# Altium PCB HMC5883_module.PcbDoc
Units mm, origin at the board's own origin, x right, y up, seen from the top; angles counter-clockwise.
Board outline 57.79 x 25.4 mm, 2 copper layers (Top Layer, Bottom Layer), stack 1.569 mm thick; 52 components, 35 nets, 175 pads, 129 vias.
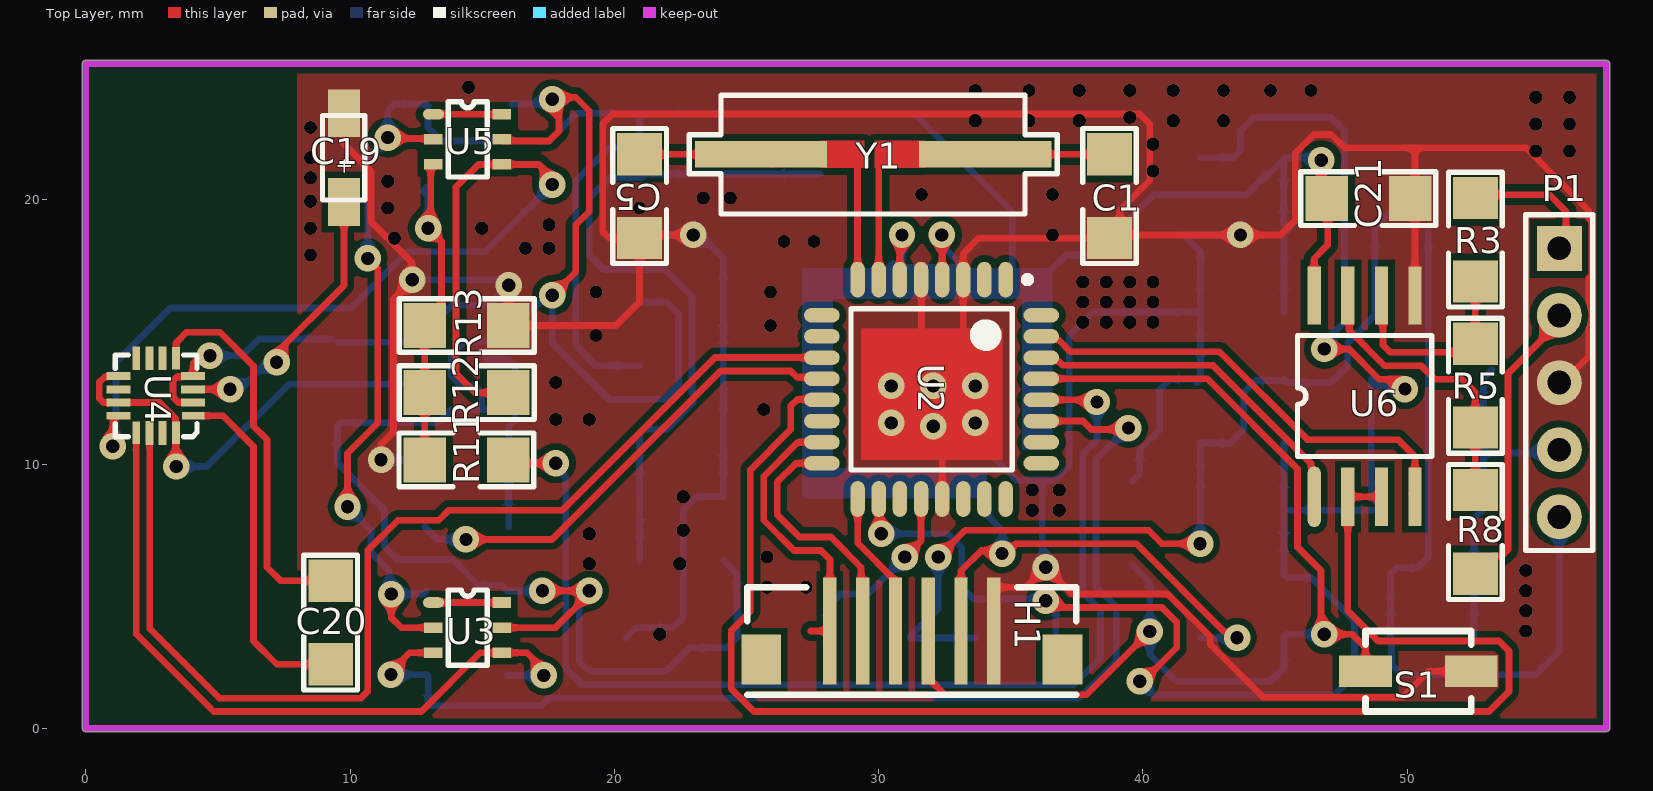
[diagram p0: Top Layer view]
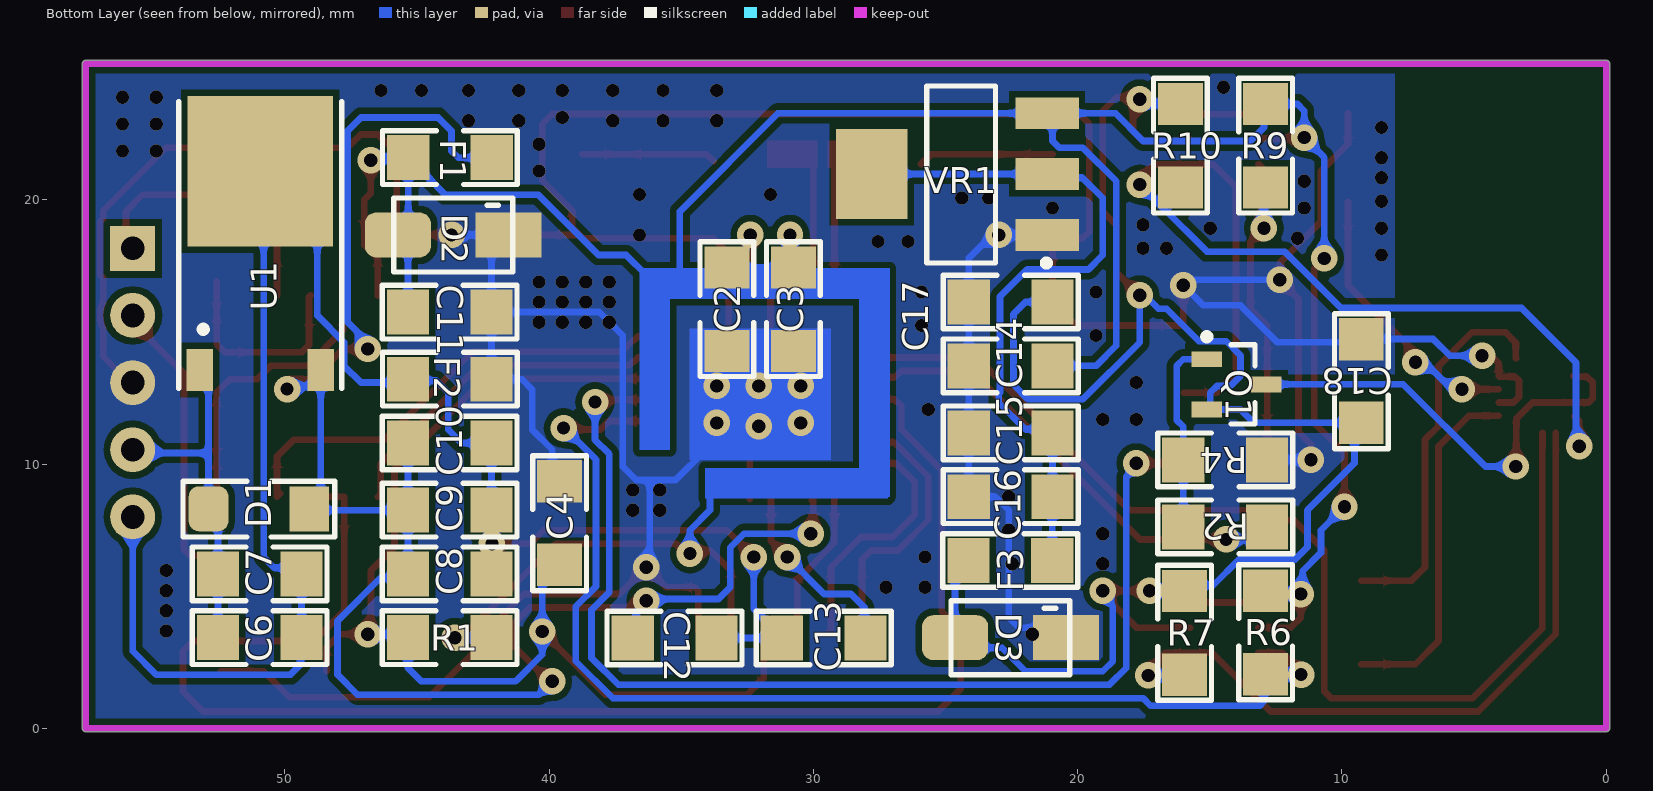
[diagram p1: Bottom Layer view, seen from below]

## Layer stack, top to bottom
Top Solder: solder mask 0.0254, SM-001, Dk 4
Top Layer: signal copper 0.035
Dielectric 1: core 1.4986, Core-043, Dk 4.3
Bottom Layer: signal copper 0.035
Bottom Solder: solder mask 0.0254, SM-001, Dk 4

## Board outline
-0.127,0 ccw(c0,0) 0,-0.127 57.531,-0.127 ccw(c57.531,0) 57.658,0 57.658,25.146 ccw(c57.531,25.146) 57.531,25.273 0,25.273 ccw(c0,25.146) -0.127,25.146

## Design rules (kind name [scope] priority, off if disabled: settings)
Clearance [All] p1: gap=0.254 ignorepadtopadclearanceinfootprint=FALSE
PolygonConnect [All] p1: connectstyle=Direct reliefconductorwidth=0.254 reliefentries=4 polygonreliefangle="90 Angle" airgapwidth=0.254
RoutingVias [All] p1: holewidth=0.5 width=1 viastyle="Through Hole" minholewidth=0.5 minwidth=1 maxholewidth=0.5 maxwidth=1
SolderMaskExpansion [All] p1: expansion=0.102 istentingtop=FALSE
Width [All] p1: maxlimit=0.254 minlimit=0.254 preferedwidth=0.254
30 further rules are at their usual default settings.

## Components (designator, comment, footprint, x,y, rotation, side; value= is the part's Value field where it differs from the comment)
C1 "18pF" 1206 38.76,20.154 r0 top
C2 "100nF" 1206 33.249,15.875 r180 bottom
C3 "100nF" 1206 30.734,15.875 r180 bottom
C4 "100nF" 1206 39.624,7.747 r0 bottom
C5 "18pF" 1206 20.98,20.154 r0 top
C6 "100nf" 1206 50.964,3.454 r90 bottom
C7 "100uf" 1206 50.964,5.867 r90 bottom
C8 "100uf" 1206 43.776,5.867 r90 bottom
C9 "100nf" 1206 43.776,8.28 r90 bottom
C10 "100nf" 1206 43.776,10.82 r90 bottom
C11 "100nf" 1206 43.776,15.773 r90 bottom
C12 "100nF" 1206 35.267,3.443 r90 bottom
C13 "100nF" 1206 29.591,3.392 r270 bottom
C14 "Cap" 1206 22.518,13.691 r270 bottom value=100nF
C15 "Cap" 1206 22.518,11.151 r270 bottom value=100uF
C16 "Cap" 1206 22.518,8.738 r270 bottom value=100nF
C17 "Cap" 1206 22.518,16.104 r270 bottom value=100nF
C18 "Cap" 1206 9.296,13.12 r0 bottom value=100nF
C19 "Cap2" CAP_SMD_A 9.75,21.59 r90 top value=4.7uf
C20 "Cap" 1206 9.246,3.988 r180 top value=220nf
C21 "Cap" 1206 48.514,20.066 r90 top value=100nF
D1 "D Schottky" ZINER 50.927,8.255 r90 bottom
D2 "SMBJ 5V" TVS 43.561,18.644 r270 bottom
D3 "SMBJ 3V3" TVS 22.479,3.404 r270 bottom
F1 "Ferrite-3uH" 1206 43.764,21.615 r90 bottom
F2 "Ferrite-3uH" 1206 43.739,13.183 r270 bottom
F3 "FERRITE BEAD" 1206 22.567,6.375 r90 bottom
H1 "White SMD Connector 6pin" "White SMD Connector 6pin B" 31.257,3.683 r180 top
P1 "Header 5" HDR1X5 55.753,18.161 r270 top
Q1 "BC807" SOT-23 14.032,13.046 r270 bottom
R1 "6.8k" 1206 43.776,3.454 r90 bottom
R2 "2.2K" 1206 14.402,7.595 r270 bottom
R3 "22" 1206 52.603,18.503 r0 top
R4 "10k" 1206 14.402,10.135 r270 bottom
R5 "220" 1206 52.553,12.947 r180 top
R6 "2.2K" 1206 12.864,3.644 r180 bottom
R7 "2.2K" 1206 15.927,3.632 r180 bottom
R8 "22" 1206 52.553,7.417 r180 top
R9 "2.2K" 1206 12.864,22.059 r180 bottom
R10 "2.2K" 1206 16.091,22.059 r180 bottom
R11 "1K" 1206 14.39,10.185 r90 top
R12 "0" 1206 14.427,12.675 r270 top
R13 "1.2K" 1206 14.427,15.215 r270 top
S1 "SW-PB_SMD" PB4x3.2 50.419,2.159 r180 top
U1 "L7805" DPAK 50.673,16.874 r90 bottom
U2 "ATmega328P-AU" 32A_L 32.004,12.827 r270 top
U3 "NDC7002N" SOP6 13.158,4.76 r0 top
U4 "HMC5883" LCC16 1.212,11.827 r180 top
U5 "NDC7002N" SOP6 13.158,23.236 r0 top
U6 "RS485 module" SOP8 48.26,12.573 r90 top
VR1 "AMS1117 3v3" LD1117 24.384,20.955 r90 bottom
Y1 "14.7456KHz" XTAL_SMD 29.54,21.666 r180 top

## Footprints (in the part's own frame and the unit in brackets; to place one, negate y for a bottom-side part, rotate by r counter-clockwise, add the part's x,y. Pads: shape width x height; smd on the part's side, far side on the other; paste and mask are expansions set on the pad)
32A_L [mm] "Thin QFP, 32-Leads, Body 7x7mm, Pitch 0.8mm, IPC High Density"
  oval 1.35x0.55 smd: 1(-4.15,2.8) 2(-4.15,2) 3(-4.15,1.2) 4(-4.15,0.4) 5(-4.15,-0.4) 6(-4.15,-1.2) 7(-4.15,-2) 8(-4.15,-2.8) 17(4.15,-2.8) 18(4.15,-2) 19(4.15,-1.2) 20(4.15,-0.4) 21(4.15,0.4) 22(4.15,1.2) 23(4.15,2) 24(4.15,2.8)
  oval 0.55x1.35 smd: 9(-2.8,-4.15) 10(-2,-4.15) 11(-1.2,-4.15) 12(-0.4,-4.15) 13(0.4,-4.15) 14(1.2,-4.15) 15(2,-4.15) 16(2.8,-4.15) 25(2.8,4.15) 26(2,4.15) 27(1.2,4.15) 28(0.4,4.15) 29(-0.4,4.15) 30(-1.2,4.15) 31(-2,4.15) 32(-2.8,4.15)
  silkscreen extent -4.27,-3.05 3.05,3.75, body extent -3.5,-3.5 3.5,3.5, height 1.2
1206 [mm]
  rect 1.7x1.6 smd: 1(-0.025,-1.6) 2(-0.025,1.563)
  silkscreen extent -1.04,-2.57 0.99,2.54, body extent -0.81,-1.68 0.79,1.68, height 1.1
CAP_SMD_A [mm]
  rect 1.8x1.2 smd: 1(-1.676,-0.025) 2(1.676,-0.025)
  silkscreen extent -1.6,-0.81 1.6,0.79
DPAK [mm]
  rect 1.6x1 smd: 1(-3.319,2.539) 3(-3.319,-2.031)
  rect 5.7x5.5 smd: 2(4.208,0.254)
  silkscreen extent -4.02,-2.83 6.83,3.34
HDR1X5 [mm] "Connector; Header; 5 Position"
  rect 1.7x1.7 hole 0.9: 1(0,0)
  round 1.7 hole 0.9: 2(2.54,0) 3(5.08,0) 4(7.62,0) 5(10.16,0)
  silkscreen extent -1.27,-1.27 11.43,1.27
LCC16 [mm] "HMC5883"
  rect 0.9x0.3 smd: 1(-0.025,0) 2(-0.025,-0.5) 3(-0.025,-1) 4(-0.025,-1.5) 9(-2.852,-1.5) 10(-2.852,-1) 11(-2.852,-0.5)
  rect 0.3x0.9 smd: 5(-0.701,-2.176) 6(-1.201,-2.176) 7(-1.701,-2.176) 14(-1.701,0.65) 15(-1.201,0.65)
  rect 0.3x0.85 smd: 8(-2.201,-2.176) 13(-2.201,0.65) 16(-0.701,0.65)
  rect 0.85x0.3 smd: 12(-2.852,0)
  silkscreen extent -3,-2.3 0.1,0.8, body extent -2.95,-2.26 0.05,0.74, height 0.9
LD1117 [mm]
  rect 1.2x2.4 smd: 1(-2.286,-3.226) 2(0.017,-3.226) 3(2.316,-3.226)
  rect 3.4x2.7 smd: 2(0.017,3.404)
  silkscreen extent -3.48,-3.32 3.35,1.33, body extent -3.35,-1.82 3.35,1.88, height 1.7
PB4x3.2 [mm]
  rect 2x1.2 smd: 1(-2,0) 2(2,0)
  silkscreen extent -2,-1.52 2,1.52
SOP6 [mm]
  oval 0.8x0.4 smd: 1(0,0)
  rect 0.7x0.4 smd: 2(0,-0.95) 3(0,-1.9) 4(2.59,-1.9) 5(2.59,-0.95) 6(2.59,0)
  silkscreen extent 0.56,-2.38 2.03,0.48, body extent -0.13,-2.41 2.67,0.49, height 0.97
SOP8 [mm]
  oval 2.3x0.5 smd: 1(-3.81,1.778)
  rect 2.2x0.5 smd: 2(-3.81,0.508) 3(-3.81,-0.762) 4(-3.81,-2.032) 5(3.806,-2.032) 6(3.806,-0.762) 7(3.806,0.508) 8(3.806,1.778)
  silkscreen extent -2.29,-2.67 2.29,2.41
SOT-23 [mm]
  rect 0.6x1.15 smd: 1(-0.919,-1.081) 2(0.981,-1.081) 3(0.031,1.169)
  silkscreen extent -1.89,-1.21 1.53,0.74, body extent -1.42,-1.18 1.48,1.12, height 1
TVS [mm]
  rrect50% 1.7x2.5 smd: 1(-0.025,-2.159)
  rect 1.7x2.5 smd: 2(-0.025,2.032)
  silkscreen extent -1.42,-2.32 1.38,2.18, body extent -1.5,-2.76 1.42,2.74, height 2.23
"White SMD Connector 6pin B" [mm] "White SMD Connector 6pin"
  rect 0.508x4.064 smd: 1(-3.1,0) 2(-1.86,0) 3(-0.62,0) 4(0.62,0) 5(1.86,0) 6(3.1,0)
  rect 1.5x1.9 smd: ""(-5.7,1.082) ""(5.7,1.082)
  silkscreen extent -6.22,-1.65 6.22,2.41
XTAL_SMD [mm]
  rect 5x1 smd: 1(-4.496,-0.051) 2(3.988,-0.051)
  silkscreen extent -7.21,-2.29 6.71,2.21
ZINER [mm]
  rect 1.7x1.5 smd mask+0.102: 1(0.051,-1.854)
  rrect50% 1.7x1.5 smd: 2(0.051,1.956)
  silkscreen extent -1.02,-2.82 1.09,2.92, body extent -0.75,-1.78 0.85,1.9, height 1.6

## Part data
C1 C2 C3 C4 C5 C12 C13: library part Cap, "Capacitor", LatestRevisionDate=17-Jul-2002, LatestRevisionNote="Re-released for DXP Platform.", PackageReference=RAD-0.3, Published=8-Jun-2000, Publisher="Altium Limited"
C6 C7 C8 C9 C10 C11: library part Cap, "Capacitor, 1206", LatestRevisionDate=17-Jul-2002, LatestRevisionNote="Re-released for DXP Platform.", PackageReference=RAD-0.3, Published=8-Jun-2000, Publisher="Altium Limited"
C14 C15 C16 C17 C18 C20 C21: "Capacitor", LatestRevisionDate=17-Jul-2002, LatestRevisionNote="Re-released for DXP Platform.", PackageReference=RAD-0.3, Published=8-Jun-2000, Publisher="Altium Limited"
C19: "TAN", PackageReference=CAPR5-4X5, Published=23-Sep-2002, Publisher="Altium Limited"
D1: "Schottky Diode, 1N4148", Code_JEDEC=DO-214-AA, LatestRevisionDate=17-Jul-2002, LatestRevisionNote="Re-released for DXP Platform.", PackageReference=SMB, Published=8-Jun-2000, Publisher="Altium Limited"
D2: library part "Diode 18TQ045", "Schottky Rectifier", ComponentLink1Description="Manufacturer Link", ComponentLink1URL=http://www.irf.com/, ComponentLink2Description=Datasheet, ComponentLink2URL=http://www.irf.com/product-info/datasheets/data/18tq.pdf, DatasheetVersion=Dec-1997, LatestRevisionDate=17-Jul-2002, LatestRevisionNote="Re-released for DXP Platform.", Note="Terminal 2 is the TAB and is electrically connected to the cathode", PackageReference=TO-220AC, PackageVersion=Feb-1998, Published=8-Jun-2000, Publisher="Altium Limited"
D3: library part "Diode 18TQ045", "TVS", ComponentLink1Description="Manufacturer Link", ComponentLink1URL=http://www.irf.com/, ComponentLink2Description=Datasheet, ComponentLink2URL=http://www.irf.com/product-info/datasheets/data/18tq.pdf, DatasheetVersion=Dec-1997, LatestRevisionDate=17-Jul-2002, LatestRevisionNote="Re-released for DXP Platform.", Note="Terminal 2 is the TAB and is electrically connected to the cathode", PackageReference=TO-220AC, PackageVersion=Feb-1998, Published=8-Jun-2000, Publisher="Altium Limited"
F1 F2: library part Inductor, "Inductor", Code_IEC=1005, Code_JEITA=0402, LatestRevisionDate=29-May-2009, LatestRevisionNote="IPC-7351 Footprint Added.", PackageDescription="Chip Inductor", PackageReference=0402-A, Published=8-Jun-2000, Publisher="Altium Limited"
F3: library part Inductor, Code_IEC=1005, Code_JEITA=0402, LatestRevisionDate=29-May-2009, LatestRevisionNote="IPC-7351 Footprint Added.", PackageDescription="Chip Inductor", PackageReference=0402-A, Published=8-Jun-2000, Publisher="Altium Limited"
H1: library part "Header 6", LatestRevisionDate=17-Jul-2002, LatestRevisionNote="Re-released for DXP Platform.", Publisher="Altium Limited"
P1: "Header, 5-Pin", LatestRevisionDate=17-Jul-2002, LatestRevisionNote="Re-released for DXP Platform.", Publisher="Altium Limited"
Q1: library part 2N3906, "PNP General Purpose Amplifier", ComponentLink1Description="Manufacturer Link", ComponentLink1URL=http://www.fairchildsemi.com/, ComponentLink2Description=Datasheet, ComponentLink2URL=http://www.fairchildsemi.com/ds/2N%2F2N3906.pdf, DatasheetVersion=1997, LatestRevisionDate=15-Jan-2003, LatestRevisionNote="PCB Footprint 'BCY-W3/D4.7' replaced", PackageDescription="TO, Flat Index; 3 In-Line, Axial Leads; Body Dia. 4.5mm; Leads 0.51 x 0.48 mm (max)", PackageReference=TO-92A, PackageVersion=Sep-1998, Published=8-Jun-2000, Publisher="Altium Limited"
R1: library part Res1, "Resistor, 6.8k", LatestRevisionDate=17-Jul-2002, LatestRevisionNote="Re-released for DXP Platform.", PackageReference=AXIAL-0.3, Published=8-Jun-2000, Publisher="Altium Limited"
R2 R3 R4 R5 R6 R7 R8 R9 R10 R11 R12 R13: library part Res1, "Resistor", LatestRevisionDate=17-Jul-2002, LatestRevisionNote="Re-released for DXP Platform.", PackageReference=AXIAL-0.3, Published=8-Jun-2000, Publisher="Altium Limited"
S1: library part SW-PB, "Switch", LatestRevisionDate=17-Jul-2002, LatestRevisionNote="Re-released for DXP Platform.", PackageReference=SPST-2, Published=24-Mar-1999, Publisher="Altium Limited"
U1: library part L7805CD2T, "Positive Voltage Regulator", ComponentLink1Description="Manufacturer Link", ComponentLink1URL=http://www.st.com/, DatasheetVersion=Dec-1998, LatestRevisionDate=17-Jul-2002, LatestRevisionNote="Re-released for DXP Platform.", PackageDescription="D2-PAK/TO-263-AB; 3 Leads (1 Cropped); Body 15.9 (inc. leads) x 10.4 mm (LxW max)", PackageReference=TO-263, Published=24-Aug-2001, Publisher="Altium Limited"
U2: "8-bit AVR Microcontroller, 32KB Flash, 1KB EEPROM, 2KB SRAM, 32-pin TQFP, Industrial Grade (-40°C to 85°C)", Supplier Part Number 1=ATMEGA328P-AU-ND, Code_JEDEC=MS-026-ABA, ComponentLink1Description="Manufacturer Link", ComponentLink1URL=http://www.atmel.com/products/avr/default.asp?, ComponentLink2Description="ATmega48A/48PA/88A/88PA/168A/168PA/328/328P Datasheet", ComponentLink2URL=http://www.atmel.com/dyn/resources/prod_documents/8271.pdf, ComponentLink3Description="ATmega48A/48PA/88A/88PA/168A/168PA/328/328P Summary", ComponentLink3URL=http://www.atmel.com/dyn/resources/prod_documents/8271S.pdf, ComponentLink4Description="Atmel.com Home", ComponentLink4URL=http://www.atmel.com, DatasheetVersion="revA, Jan-2010", PackageDescription="32-Lead, 7x7x1.0 mm Body, 0.8mm Lead Pitch, Thin Profile Plastic Quad Flat Package (TQFP)", PackageReference=32A, PackageVersion="revB, Oct-2001", Published=1-Apr-2010, Publisher="Altium Limited", Supplier 1=Digi-Key, Supplier 2=Farnell, Supplier 3=Mouser, Supplier Part Number 2=1715486, Supplier Part Number 3=556-ATMEGA328P-AU
U6: library part rs485
VR1: library part "Volt Reg", "Voltage Regulator", LatestRevisionDate=29-May-2009, LatestRevisionNote="IPC-7351 Footprint Added.", PackageDescription="3-Pin Transistor Outline Package 2.54 mm Pitch, 15.1 mm Lead Span", PackageReference=D2PAK, Published=24-Mar-1999, Publisher="Altium Limited"
Y1: library part XTAL, "Crystal Oscillator, 14.7456KHz", LatestRevisionDate=17-Jul-2002, LatestRevisionNote="Re-released for DXP Platform.", PackageReference=R38, Published=8-Jun-2000, Publisher="Altium Limited"

## Via types
v1: diameter 0.5, hole 0.5, Top Layer to Bottom Layer, 81 vias
v2: diameter 1, hole 0.5, Top Layer to Bottom Layer, 48 vias

## Nets (pads, with @x,y where several pads share a name; then routed paths per layer and width w, separated by ;. In a path a pad name is that pad's centre, name@x,y a point inside that pad or via, vN(x,y) a via of type N, cw(c..) or ccw(c..) an arc to the next point about the centre after c; other vN are vias at no path point)
3V3D: C17.2 C18.2 D3.1 F3.2 Q1.2 R7.2 R10.2 U3.5 U5.5 | length 70
  Top Layer w0.254: U3.5 17.78,3.81 19.05,5.08 18.923,5.207 v2(17.28,5.207) ; U5.5 15.809,22.225 17.526,22.225 17.907,22.606 v2@17.907,23.749 ; v2(17.653,16.383) 18.542,17.272 18.542,19.05 19.05,19.558 19.05,23.368 18.542,23.876 17.729,23.876 v2(17.653,23.8)
  Bottom Layer w0.254: R10.2 v2@17.653,23.622 ; v2(17.28,5.207) 17.268,5.195 R7.2 15.732,5.415 14.87,5.415 13.897,6.388 11.773,6.388 11.303,6.858 11.303,8.255 9.525,10.033 9.525,11.442 9.64,11.557 13.335,11.557 13.843,12.065 Q1.2 14.986,12.192 14.986,12.7 14.732,12.954 14.224,12.954 13.843,13.335 13.843,14.109 14.38,14.646 15.408,14.646 16.637,15.875 16.943,15.875 17.451,16.383 v2(17.653,16.383) 17.653,14.605 19.812,12.446 21.874,12.446 22.429,13.001 22.429,15.671 21.971,16.129 C17.2 ; v2(19.05,5.207) 19.05,5.005 18.669,4.624 18.669,2.54 19.05,2.159 21.971,2.159 22.86,3.048 24.257,3.048 D3.1 24.638,5.842 F3.2
5V0A: C8.2 C9.2 C10.2 C12.2 D1.1 F1.1 U1.3 U2.18 | length 67.8
  Top Layer w0.254: U2.18@30.061,8.62 U2.18 30.004,7.461 v2(30.099,7.366) ; v2(36.322,4.826) 36.576,4.572 40.727,4.572 41.275,4.024 41.275,3.048 40.005,1.778 v2(39.878,1.778) ; v2(46.863,14.351) 47.796,14.351 48.939,13.208 49.762,13.208 49.768,13.202 49.768,12.978 v2(49.911,12.835)
  Bottom Layer w0.254: v2(30.099,7.366) 32.615,7.366 33.147,6.834 33.147,5.334 33.591,4.889 36.258,4.889 36.703,4.445 36.703,3.545 C12.2 ; v2(39.878,1.778) 40.386,1.27 47.244,1.27 48.006,2.032 48.006,4.064 46.371,5.699 45.482,5.699 C8.2 C9.2 ; F1.1 43.434,21.59 43.688,21.844 43.688,22.606 44.196,23.114 47.117,23.114 47.625,22.606 47.625,15.367 46.863,14.605 v2(46.863,14.351) ; C10.2 C9.2 ; v2(49.911,12.835) 49.792,12.954 48.896,12.954 48.642,13.208 48.642,8.737 D1.1 49.022,8.255 C9.2
5V0D: C2.2 C3.2 C11.2 C14.2 C21.2 D2.1 F1.2 H1.2 R1.1 R6.2 R9.2 U2.4 U2.6 U3.2 U5.2 U6.8 VR1.3 | length 122
  Top Layer w0.254: v2(9.906,8.382) 9.906,10.406 11.049,11.549 11.049,17.399 v2(10.668,17.78) ; v2(11.43,22.352) 11.463,22.319 13.125,22.319 U5.2 ; v2(11.557,5.08) 11.557,4.191 11.938,3.81 U3.2 ; U2.6 30.804,18.588 v2(30.885,18.669) ; v2(32.385,18.669) 32.404,18.65 U2.4 ; H1.2 33.117,5.963 33.885,6.731 34.552,6.731 v2(34.671,6.612) 34.82,6.612 35.193,6.985 39.751,6.985 43.065,3.671 43.117,3.671 43.359,3.429 v2(43.561,3.429) ; U6.8 46.482,17.78 46.99,18.288 46.99,20.002 C21.2 46.744,20.248 v2(46.744,21.495)
  Bottom Layer w0.254: v2(9.906,8.382) 10.795,7.493 10.795,6.648 11.482,5.961 11.482,5.155 v2(11.557,5.08) 12.762,5.08 R6.2 ; v2(10.668,17.78) 10.668,21.59 v2(11.43,22.352) 11.43,23.368 11.684,23.622 R9.2 12.954,23.557 12.954,22.733 13.462,22.225 17.526,22.225 18.572,23.271 VR1.3 ; C14.2 19.304,13.716 18.542,14.478 18.542,20.701 19.812,21.971 20.701,21.971 20.955,22.225 20.955,23.068 VR1.3 ; 28.702,16.764 28.829,16.891 29.845,16.891 C3.2@30.551,17.597 ; C3.2 30.885,17.563 v2(30.885,18.669) ; C3.2@30.809,17.438 C2.2@33.224,17.438 ; v2(32.385,18.669) 32.385,18.467 32.551,18.301 32.551,18.111 C2.2@33.224,17.438 ; C2.2 C2.2@33.224,17.438 ; 33.528,9.144 33.655,9.144 33.909,8.89 33.909,8.255 34.671,7.493 v2(34.671,6.612) ; 35.052,17.145 35.052,19.558 31.339,23.271 VR1.3 ; 36.195,17.145 36.322,17.145 37.084,17.907 38.128,17.907 40.414,20.193 43.93,20.193 44.604,20.867 44.654,20.867 F1.2@45.327,21.54 ; R1.1 v2(43.561,3.429) ; C11.2 45.339,18.681 45.524,18.865 45.327,19.062 F1.2@45.327,21.54 ; v2(46.744,21.495) 46.649,21.59 F1.2 F1.2@45.327,21.54
DRDY: U2.11 U4.15 | length 42.4
  Top Layer w0.254: 2.414,10.605 U4.15 ; 2.422,10.605 2.422,3.775 5.054,1.143 10.414,1.143 10.668,1.397 10.668,6.731 11.811,7.874 13.359,7.874 13.74,8.255 18.034,8.255 23.806,14.027 U2.11
GND: C6.1 C7.1 C8.1 C9.1 C10.1 C12.1 C13.1 F2.1 P1.5 U1.2 | length 65.9
  Top Layer w0.254: v2(32.258,6.477) 33.274,7.493 40.215,7.493 40.723,6.985 v2(42.164,6.985)
  Bottom Layer w0.254: v2@32.258,6.223 32.258,4.535 31.191,3.468 C13.1 C12.1 ; v2@42.176,6.985 C9.1 C10.1 43.307,10.795 43.815,11.303 43.815,12.7 44.273,13.158 F2.1@45.339,13.158 ; F2.1 F2.1@45.339,13.158 ; U1.2@50.8,18.796 50.8,6.477 50.396,6.073 49.595,6.073 C7.1 C6.1 49.403,3.39 49.403,2.413 49.784,2.032 54.864,2.032 55.753,2.921 P1.5 ; U1.2 48.768,18.923 48.768,15.621 47.752,14.605 47.752,13.716 47.117,13.081 45.416,13.081 F2.1@45.339,13.158
GNDD: C1.1 C2.1 C3.1 C4.1 C5.1 C11.1 C14.1 C15.1 C16.1 C17.1 C18.1 C19.2 C21.1 D2.2 D3.2 F2.2 H1.1 P1.3 R4.2 R13.2 S1.1 U2.3 U2.5 U2.21 U4.9 U4.11 U6.5 VR1.1 | length 211.2
  Top Layer w0.254: U4.11 3.51,12.327 3.302,12.535 3.302,13.155 3.451,13.304 4.041,13.304 U4.9 ; U4.9@4.064,13.358 4.064,13.805 4.213,13.954 4.556,13.954 v2(4.699,14.097) ; C19.2 9.775,22.102 10.795,21.082 10.795,19.175 12.326,17.644 12.326,17.005 v2(12.355,16.976) ; v2(11.176,10.16) 11.176,10.743 11.646,11.213 11.646,16.248 12.146,16.748 12.232,16.748 v2@12.407,16.924 ; v2(16.002,16.764) 16.002,15.252 R13.2 20.066,15.24 20.955,16.129 C5.1 ; v2(22.987,18.669) 21.07,18.669 C5.1 ; U2.5 31.547,16.92 31.623,16.845 31.623,14.859 30.734,13.97 30.734,12.954 30.734,11.557 30.928,11.751 30.928,12.534 33.204,14.81 U2.3 33.204,17.964 33.782,18.542 36.576,18.542 C1.1@38.735,18.542 ; 32.385,10.668 32.404,10.649 U2.21 ; 33.196,10.525 33.196,11.225 v2@33.528,11.557 ; H1.1 34.357,5.207 34.484,5.334 35.56,5.334 v2(36.322,6.096) 37.338,5.08 40.938,5.08 42.545,3.473 42.545,3.175 44.542,1.178 49.819,1.178 50.8,2.159 S1.1 ; C1.1 C1.1@38.85,18.669 ; U6.5 50.292,19.813 50.114,19.991 C21.1 50.292,20.218 50.292,21.971 ; P1.3 55.88,13.081 56.867,14.068 56.867,15.096 ccw(c55.753,15.621) 56.867,16.146 56.867,17.036 56.984,17.153 56.984,19.169 56.867,19.286 56.867,19.587 56.792,19.662 54.483,21.971 50.292,21.971 ; C5.1 20.943,18.542 19.812,18.542 19.558,18.796 19.558,22.86 19.939,23.241 39.497,23.241 39.878,23.241 40.259,22.86 40.259,22.098 40.259,21.082 40.259,20.723 39.122,19.586 39.122,18.941 C1.1@38.85,18.669 ; C1.1@38.85,18.669 v2(43.688,18.669) 45.212,18.669 45.76,19.217 45.76,21.757 46.474,22.471 47.125,22.471 47.625,21.971 50.292,21.971
  Bottom Layer w0.254: v2(4.699,14.097) 5.914,14.097 6.549,14.732 9.259,14.732 C18.1 ; C18.1@9.525,14.605 12.446,14.605 13.843,16.002 15.24,16.002 v2(16.002,16.764) 15.8,16.764 15.589,16.976 v2(12.355,16.976) ; v2(11.176,10.16) R4.2 ; D3.2 20.828,3.81 22.225,3.81 22.606,4.191 v1(22.606,7.493) 22.606,8.255 23.114,8.763 C16.1 C15.1 C14.1 C17.1 24.118,17.792 23.241,18.669 v2(22.987,18.669) VR1.1 ; 33.274,10.668 33.401,10.541 34.068,10.541 35.211,9.398 36.195,9.398 ; v2(36.322,6.096) 36.195,6.223 36.195,9.398 ; C4.1 39.878,9.627 39.878,10.541 40.64,11.303 40.64,12.827 41.021,13.208 41.922,13.208 42.049,13.081 F2.2 C11.1 ; v2(43.688,18.669) D2.2 42.176,18.022 C11.1 ; 36.195,9.398 36.703,9.398 37.211,9.906 37.211,14.859 v1(37.719,15.367) 38.1,15.748 C11.1
  other v1: 21.717,3.556 54.483,3.683 54.483,4.445 54.483,5.207 25.781,5.334 27.257,5.334 54.483,5.969 19.05,6.223 22.479,6.223 25.781,6.477 19.05,7.366 35.814,8.255 36.83,8.255 22.606,8.763 35.814,9.017 36.83,9.017 17.78,11.684 19.05,11.684 25.654,12.065 17.78,13.081 19.304,14.859 25.908,15.24 38.608,15.367 39.497,15.367 40.386,15.367 37.719,16.129 38.608,16.129 39.497,16.129 40.386,16.129 19.304,16.51 25.908,16.51 37.719,16.891 38.608,16.891 39.497,16.891 40.386,16.891 8.509,17.907 16.637,18.161 17.526,18.161 26.416,18.415 27.559,18.415 11.684,18.542 36.576,18.669 8.509,18.923 14.986,18.923 17.526,19.05 11.43,19.685 20.955,19.685 8.509,19.939 23.368,20.066 24.384,20.066 31.623,20.193 36.576,20.193 11.43,20.701 8.509,20.828 40.386,21.082 8.509,21.59 54.864,21.844 56.134,21.844 40.386,22.098 8.509,22.733 54.864,22.86 56.134,22.86 33.655,22.987 35.687,22.987 37.592,22.987 41.148,22.987 43.053,22.987 39.497,23.114 54.864,23.876 56.134,23.876 33.655,24.13 35.687,24.13 37.592,24.13 39.497,24.13 41.148,24.13 43.053,24.13 44.831,24.13 46.355,24.13 14.478,24.257
  other v2: 32.067,11.43 30.48,11.557 33.655,11.557 30.48,12.954 32.067,12.954 33.655,12.954
MCU_RST: C4.2 H1.3 R1.2 S1.2 U2.29 | length 44
  Top Layer w0.254: H1.3 31.877,1.905 32.512,1.27 36.049,1.27 37.865,1.27 v2(40.259,3.664) ; U2.29 42.443,13.227 45.851,9.819 45.851,6.854 46.736,5.969 46.736,3.683 v2(46.863,3.556) 47.923,3.556 48.419,3.06 S1.2
  Bottom Layer w0.254: C4.2 40.259,5.524 v2(40.259,3.664) 40.259,2.794 41.275,1.778 44.831,1.778 45.339,2.286 R1.2 45.466,3.556 v2(46.863,3.556)
MCU_RX: U2.30 U6.1 | length 13.2
  Top Layer w0.254: U2.30 36.634,14.027 36.778,13.883 36.826,13.883 36.974,13.735 42.653,13.735 46.363,10.025 46.363,8.882 U6.1
MCU_SCL: R11.1 U2.28 | length 43
  Top Layer w0.254: R11.1 16.117,10.033 v2(17.78,10.033) ; U2.28 38.178,12.427 v2(38.259,12.346)
  Bottom Layer w0.254: v2(17.78,10.033) 17.78,9.892 18.161,9.511 18.161,2.286 18.796,1.651 37.382,1.651 38.392,2.662 38.392,4.483 37.719,5.157 37.719,10.375 38.259,10.915 v2(38.259,12.346)
MCU_SDA: R6.1 U2.27 U3.3 | length 44.3
  Top Layer w0.254: v2(11.549,2.032) 11.549,2.151 12.258,2.86 U3.3 ; U2.27 37.732,11.627 38.056,11.303 39.394,11.303 v2(39.452,11.361)
  Bottom Layer w0.254: v2(11.549,2.032) 12.877,2.032 R6.1 12.958,1.975 12.958,1.012 13.119,0.851 17.234,0.851 17.526,1.143 37.592,1.143 38.989,2.54 38.989,4.605 38.227,5.367 38.227,10.164 39.366,11.303 39.394,11.303 v2(39.452,11.361)
MCU_TX: U2.31 U6.4 | length 17.6
  Top Layer w0.254: U2.31 36.634,14.827 36.778,14.683 36.826,14.683 37.266,14.243 42.863,14.243 42.882,14.224 42.926,14.224 46.228,10.922 49.657,10.922 50.292,10.287 U6.4@50.292,8.882 ; U6.4@50.173,8.882 U6.4
MISO: H1.5 U2.16 | length 9.7
  Top Layer w0.254: U2.16 26.874,10.027 26.162,9.315 26.162,8.084 27.007,7.239 28.194,7.239 29.337,6.096 29.337,3.743 H1.5
MOSI: H1.6 U2.15 | length 10.9
  Top Layer w0.254: 27.432,3.683 H1.6 28.157,6.387 27.813,6.731 26.797,6.731 25.654,7.874 25.654,9.525 26.956,10.827 U2.15
NetC13_2: C13.2 U2.20 | length 7.3
  Top Layer w0.254: v2(30.988,6.477) 31.604,7.093 U2.20
  Bottom Layer w0.254: C13.2 28.067,3.457 28.067,4.572 28.575,5.08 29.591,5.08 v2(30.988,6.477)
NetC15_2: C15.2 C16.2 F3.1 VR1.2 | length 27.2
  Bottom Layer w0.254: F3.1 20.967,8.751 C16.2 C15.2 21.098,11.319 21.987,11.319 22.987,12.319 22.987,12.658 22.937,12.708 22.937,16.336 21.913,17.36 19.597,17.36 19.05,17.907 19.05,20.066 19.812,20.828 21.015,20.828 21.158,20.972 VR1.2@27.788,20.972
NetC19_1: C19.1 U4.10 | length 10.8
  Top Layer w0.254: U4.10 v2(5.461,12.827) ; v2(7.221,13.851) 7.149,13.923 7.149,14.134 9.775,16.76 C19.1
  Bottom Layer w0.254: v2(5.461,12.827) 5.842,12.827 6.834,13.819 7.189,13.819 v2(7.221,13.851)
NetC20_1: C20.1 U4.8 | length 14.7
  Top Layer w0.254: U4.8 3.429,14.018 3.429,14.605 3.81,14.986 5.08,14.986 6.35,13.716 6.35,11.43 6.858,10.922 6.858,6.096 7.366,5.588 C20.1
NetC20_2: C20.2 U4.12 | length 13.4
  Top Layer w0.254: U4.12 5.191,11.827 6.35,10.668 6.35,3.302 7.227,2.425 C20.2
NetP1_1: P1.1 R3.2 | length 5.1
  Top Layer w0.254: R3.2 52.705,20.193 55.372,20.193 56.007,19.558 P1.1@56.007,18.161
NetP1_2: P1.2 R8.2 | length 11.4
  Top Layer w0.254: R8.2 53.251,6.527 53.572,6.527 53.809,6.764 53.809,13.423 P1.2@56.007,15.621
NetQ1_1: Q1.1 R2.1 R4.1 | length 7.4
  Bottom Layer w0.254: Q1.1 16.007,13.965 16.256,13.716 16.256,11.665 16.002,11.411 R4.1 R2.1
NetQ1_3: Q1.3 U4.2 U4.4 U4.13 | length 17.2
  Top Layer w0.254: U4.4 1.215,13.304 0.731,13.304 0.508,13.081 0.508,12.493 0.674,12.327 2.792,12.327 3.4,11.719 3.4,11.425 3.403,11.425 3.403,9.932 v2(3.429,9.906)
  Bottom Layer w0.254: v2(3.429,9.906) 4.572,9.906 7.681,13.015 Q1.3
NetR7_1: R7.1 U3.4 U4.16 | length 27.1
  Top Layer w0.254: U4.16 1.914,10.55 1.905,10.541 1.914,10.532 1.914,3.565 4.843,0.635 12.7,0.635 14.925,2.86 U3.4 16.698,2.86 17.337,2.221 17.337,2.011 v2(17.327,2.001)
  Bottom Layer w0.254: R7.1 15.983,2.001 v2(17.327,2.001)
NetR9_1: R9.1 R11.2 R12.1 R13.1 U5.3 | length 13.7
  Top Layer w0.254: R11.2 R12.1 R13.1 13.462,15.875 13.462,18.415 v2(12.954,18.923) 13.056,19.025 13.056,21.263 13.129,21.336 U5.3
  Bottom Layer w0.254: v2@12.7,18.923 v2(12.954,18.923) 12.954,20.116 12.75,20.32 R9.1
NetR10_1: R10.1 R12.2 U4.1 U5.4 | length 37.6
  Top Layer w0.254: v2(1.021,10.673) 1.021,11.61 U4.1@1.207,11.796 ; R12.2 14.732,12.7 14.008,13.424 14.008,20.485 14.859,21.336 U5.4 17.145,21.336 v2@17.907,20.574
  Bottom Layer w0.254: v2(1.021,10.673) 1.143,10.795 1.143,13.843 3.201,15.901 10.035,15.901 10.644,16.51 11.549,17.415 12.168,18.034 15.113,18.034 16.852,19.773 v2(17.653,20.574)
NetU3_1: U3.1 U3.6 | length 2.6
  Top Layer w0.254: U3.1 U3.6
NetU5_1: U5.1 U5.6 | length 2.6
  Top Layer w0.254: U5.1 U5.6
RS485_A: R3.1 R5.1 U6.6 | length 8
  Top Layer w0.254: U6.6 49.079,16.322 49.079,14.504 49.359,14.224 52.255,14.224 R5.1 R3.1
RS485_B: R5.2 R8.1 U6.7 | length 10.8
  Top Layer w0.254: U6.7 47.809,16.322 47.809,15.056 49.149,13.716 50.546,13.716 51.054,13.208 52.07,13.208 52.578,12.7 R5.2 R8.1
RTS: U2.13 U6.2 U6.3 | length 56.9
  Top Layer w0.254: U2.13 27.835,12.446 26.924,12.446 26.67,12.192 26.67,11.303 25.146,9.779 25.146,4.429 24.426,3.709 24.426,1.493 25.284,0.635 53.086,0.635 53.848,1.397 53.848,2.921 53.467,3.302 48.895,3.302 47.752,4.445 U6.2 U6.3
SCK: H1.4 U2.17 | length 5.7
  Top Layer w0.254: U2.17 29.21,8.671 29.21,7.009 30.607,5.612 30.607,3.907 30.51,3.81 H1.4
SENSOR_E\N\: R2.2 U2.12 | length 18
  Top Layer w0.254: v2(14.385,7.146) 17.643,7.146 24.016,13.519 26.67,13.519 26.905,13.284 27.797,13.284 U2.12
  Bottom Layer w0.254: R2.2 13.313,7.146 v2(14.385,7.146)
VCC_IN: C6.2 C7.2 D1.2 P1.4 U1.1 | length 13.6
  Bottom Layer w0.254: C6.2 C7.2 52.527,7.95 D1.2 52.883,10.414 ; U1.1 52.883,13.226 52.883,10.414 ; P1.4@56.007,10.541 55.88,10.414 52.883,10.414
XTAL1: C1.2 U2.7 Y1.1 | length 9.6
  Top Layer w0.254: 29.972,21.463 30.004,21.431 U2.7 ; Y1.1@33.782,21.463 Y1.1 C1.2
XTAL2: C5.2 U2.8 Y1.2 | length 9.7
  Top Layer w0.254: C5.2 Y1.2 Y1.2@25.925,21.344 ; U2.8 29.204,21.584 29.21,21.59
pads on no net: H1. U2.1 U2.2 U2.9 U2.10 U2.14 U2.19 U2.22 U2.23 U2.24 U2.25 U2.26 U2.32 U4.3 U4.5 U4.6 U4.7 U4.14

## Polygon pours and split planes (outlines as drawn)
GNDD on Bottom Layer "GNDD_L02_P000" (solid, remove dead copper, pour order 0): 0,25.146 57.531,25.146 57.531,0 0,0
GNDD on Top Layer "GNDD_L01_P001" (solid, remove dead copper, pour order 1): 0,25.146 57.531,25.146 57.531,0 0,0

## Keep-outs
Keep-Out Layer:
  lines w0.254: 0,0 0,25.146 57.531,25.146 57.531,0 0,0

## Other copper
Top Layer:
  region: 2.422,10.605 2.414,10.613
  region net XTAL2: 27.813,21.209 27.813,22.225 29.464,22.225 29.464,21.209
  region net XTAL1: 31.75,21.209 29.845,21.209 29.845,22.225 31.75,22.225
  pour cut-out: 0,25.146 8.001,25.146 8.001,0 0,0
  region net GNDD: 29.337,15.113 34.671,15.113 34.671,10.16 29.337,10.16
Bottom Layer:
  pour cut-out: 0,0 0,25.146 8.001,25.146 8.001,0
  region net 5V0D: 34.099,9.842 34.099,8.699 27.178,8.7 27.178,9.842
  region net 5V0D: 27.115,17.399 28.258,17.399 28.258,8.763 27.114,8.763
  region net 5V0D: 27.114,16.256 27.114,17.399 36.576,17.399 36.576,16.256
  region net 5V0D: 35.433,16.637 36.576,16.637 36.576,10.541 35.433,10.541
  region net GNDD: 29.337,15.113 34.671,15.113 34.671,10.16 29.337,10.16

## Silkscreen, mask and mechanical layers (free items; w line width, h text height)
Top Solder:
  drawing of 19 lines, arcs and shapes, not listed
  text "x" at 3.302,7.747 h1
  text "Y" at 3.302,4.064 h1

## Text inside footprints (layer, text, board x,y; h text height)
C19: Top Overlay "+" at 10.054,20.93 h0.6 r90